# EAGLE board ArtemisDevKit-Panel (EAGLE 9.6.0), part 1 of 3
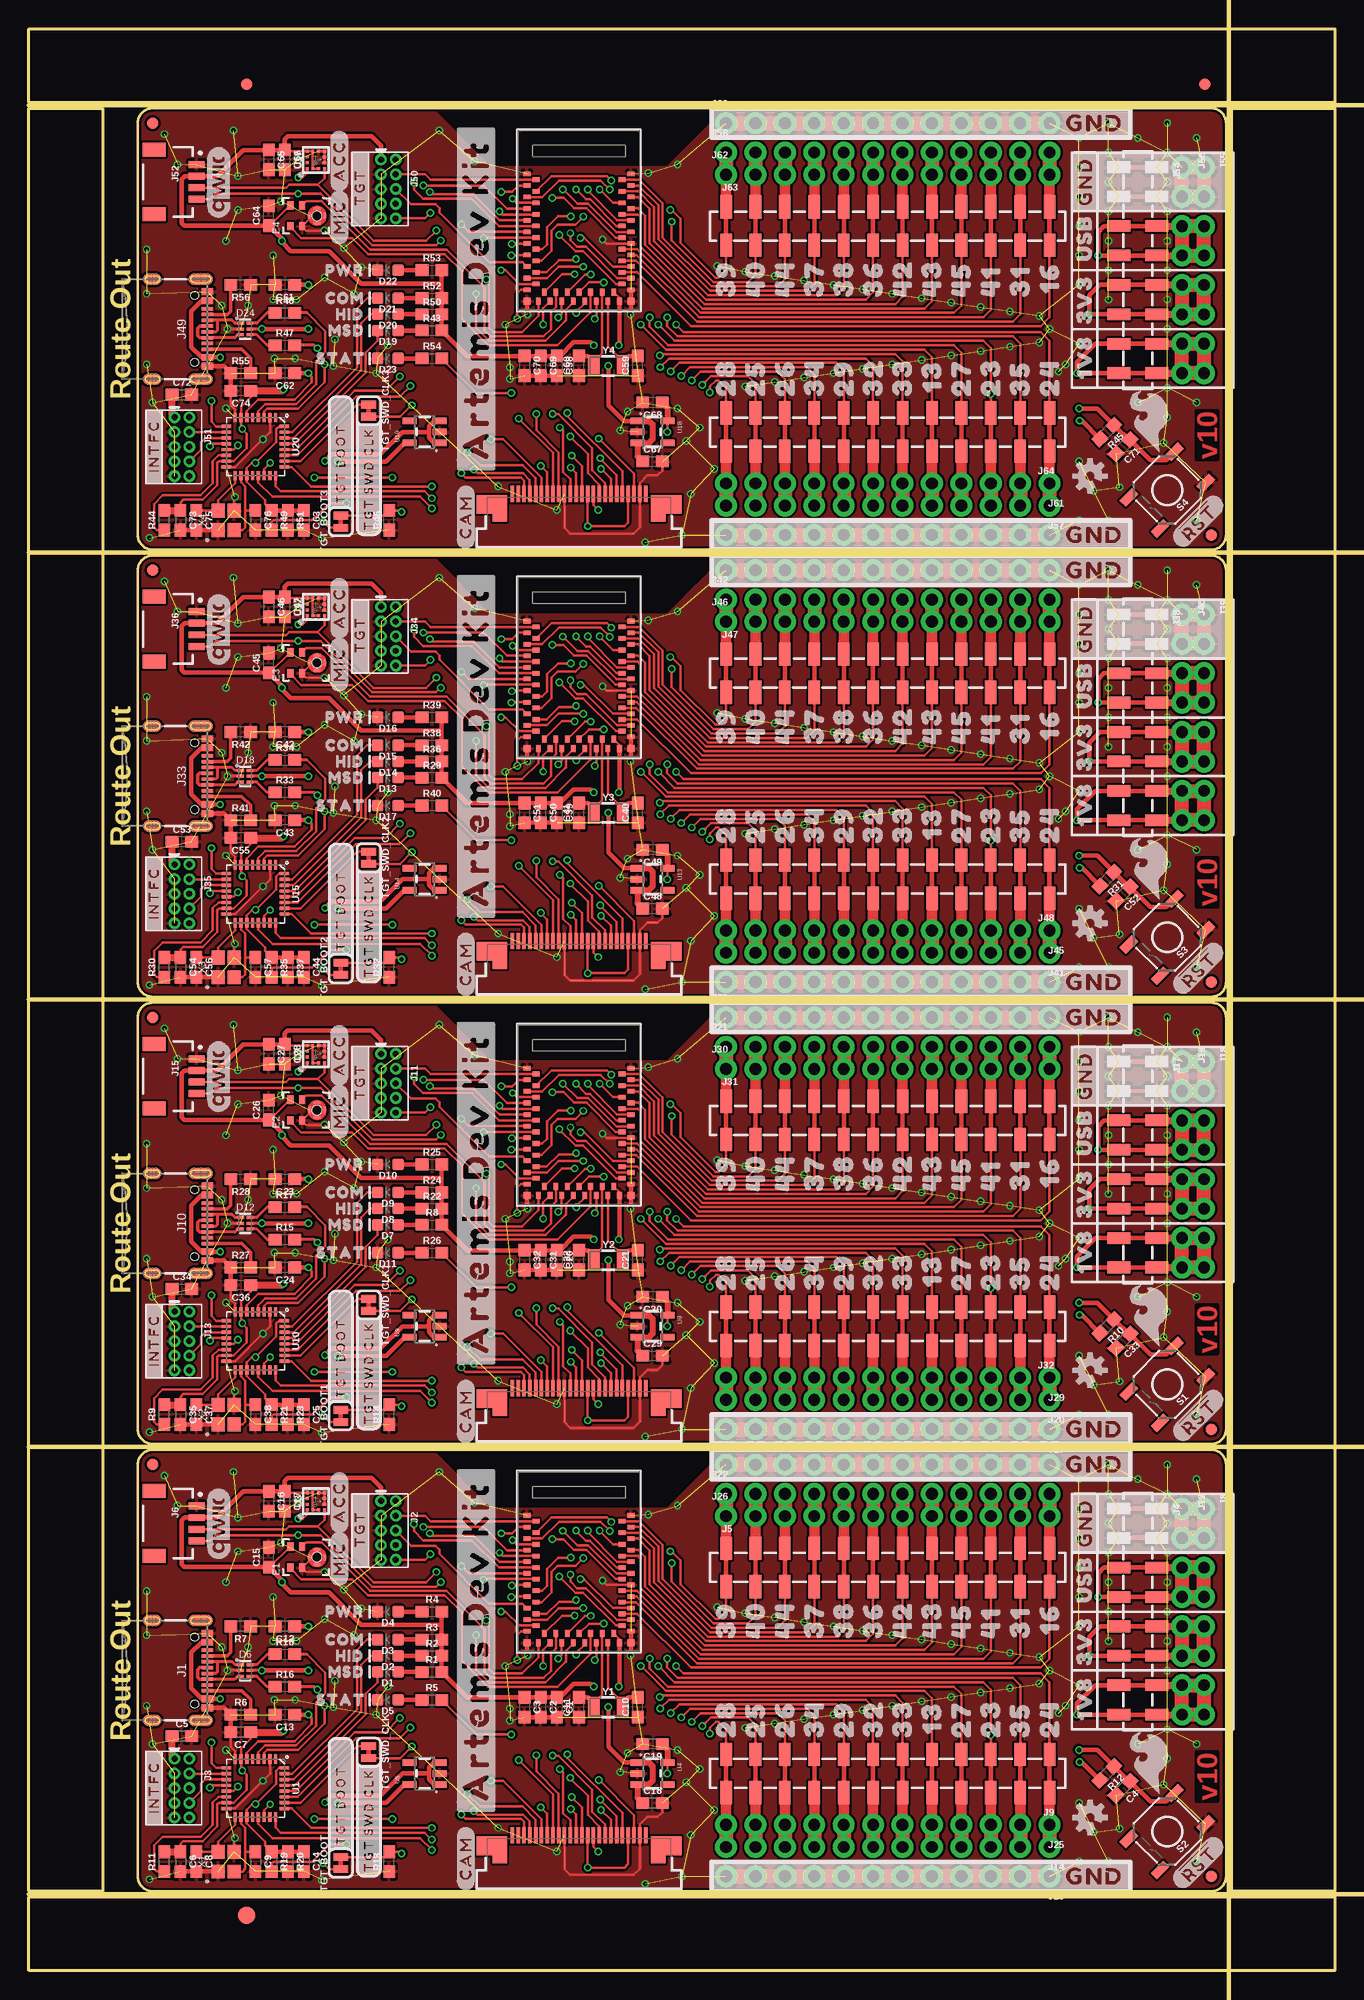
[diagram p0: board, top side]
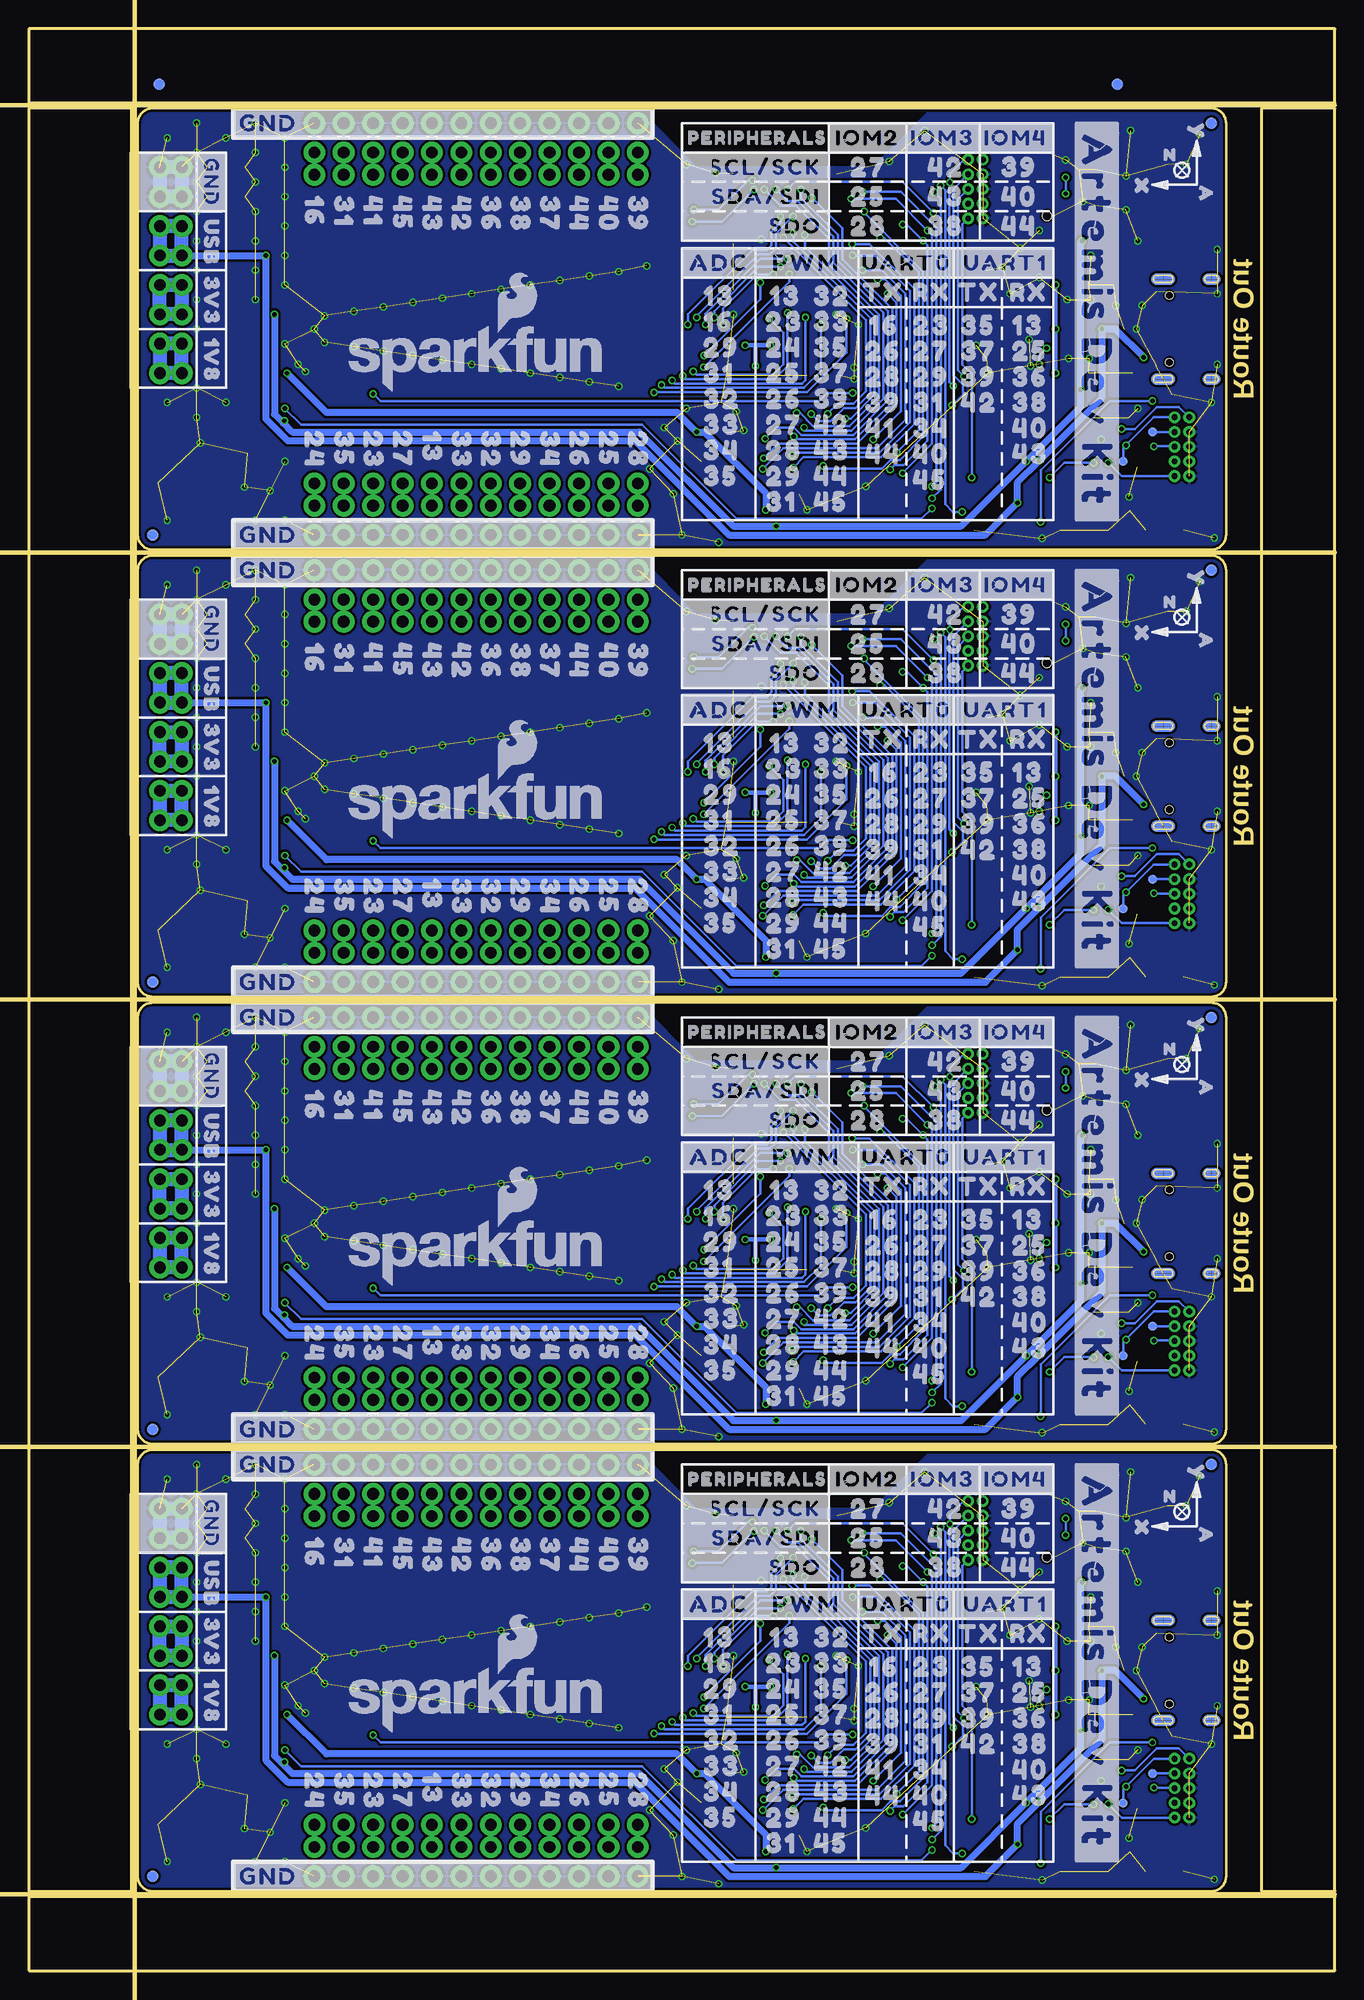
[diagram p1: board, bottom side, seen from below]

Size 112.78 x 167.65 mm. Coordinates in mm from the lower left corner, seen from the top.
Outline: 102.11,44.96 10.67,44.96 arc90 9.4,43.69 9.4,8.13 arc90 10.67,6.86 102.11,6.86 arc90 103.38,8.13 103.38,43.69 arc90 102.11,44.96
Outline: 102.11,83.57 10.67,83.57 arc90 9.4,82.3 9.4,46.74 arc90 10.67,45.47 102.11,45.47 arc90 103.38,46.74 103.38,82.3 arc90 102.11,83.57
Outline: 102.11,122.18 10.67,122.18 arc90 9.4,120.91 9.4,85.35 arc90 10.67,84.08 102.11,84.08 arc90 103.38,85.35 103.38,120.91 arc90 102.11,122.18
Outline: 102.11,160.79 10.67,160.79 arc90 9.4,159.52 9.4,123.96 arc90 10.67,122.69 102.11,122.69 arc90 103.38,123.96 103.38,159.52 arc90 102.11,160.79
Outline: 0,6.35 112.78,6.35 112.78,0 0,0 0,6.35
Outline: 103.89,160.79 112.78,160.79 112.78,6.86 103.89,6.86 103.89,160.79
Outline: 0,167.65 112.78,167.65 112.78,161.3 0,161.3 0,167.65
Outline: 0,160.79 6.35,160.79 6.35,6.86 0,6.86 0,160.79
Copper layers (1*16): Top 0.035mm / dielectric 1.5mm / Bottom 0.035mm
Design rules "ArtemisDevKit": minimum track width 4mil, minimum drill 6mil, track to track 4mil, track to pad 4mil, pad to pad 4mil, via to via 4mil, smd to smd 4mil, copper to edge 4mil, drill to drill 4mil, minimum pad ring 5mil, minimum via ring 5mil, stop-mask expansion 4mil, vias tented up to drill 25mil, thermal gap 10mil
Milling: 6 lines

## Footprints (pad centres in the part's own frame; a part is rotated, then mirrored left to right if it is on the bottom)
0603 = smd 1.1 x 1: 1 -0.85,0; 2 0.85,0
LED-0603 = smd 1 x 1: A -0.877,0; C 0.877,0
SOT886 = smd 0.61 x 0.25: 1 -0.405,0.5 | smd 0.56 x 0.25: 2 -0.43,0; 3 -0.43,-0.5; 4 0.43,-0.5; 5 0.43,0; 6 0.43,0.5
SPH0641LM4H-1_MICROPHONE = smd 0.725 x 0.522: 1 -0.9,1.3; 2 -0.9,0.3; 4 0.9,0.3; 5 0.9,1.3 | smd 0.5 x 0.2: 3 0,-1.65; 8 0,-0.35 | smd 0.2 x 0.5: 6 -0.65,-1; 7 0.65,-1 | hole 0.8: 0,-1
FIDUCIAL-1X2 = smd 1 x 1: 1 0,0
FIDUCIAL-1.5X3 = smd 1.5 x 1.5: 1 0,0
USB-C-16P = smd 0.3 x 1: A5 -1.25,-0.34; A6 -0.25,-0.34; A7 0.25,-0.34; A8 1.25,-0.34; B5 1.75,-0.34; B6 0.75,-0.34; B7 -0.75,-0.34; B8 -1.75,-0.34 | smd 0.6 x 1: GND -3.225,-0.34; GND2 3.225,-0.34; VBUS1 -2.45,-0.34; VBUS2 2.45,-0.34 | smd 1 x 2.1: SHLD1 -4.32,-0.915; SHLD2 4.32,-0.915 | smd 1 x 2.1 bottom: SHLD3 -4.32,-0.915; SHLD4 4.32,-0.915 | smd 1 x 1.6: SHLD5 -4.32,-5.095; SHLD8 4.32,-5.095 | smd 1 x 1.6 bottom: SHLD6 -4.32,-5.095; SHLD7 4.32,-5.095 | hole 0.65: -2.89,-1.445; 2.89,-1.445
2X5-PTH-1.27MM = drill 0.508 pad 1: 1 -2.54,-0.635; 2 -2.54,0.635; 3 -1.27,-0.635; 4 -1.27,0.635; 5 0,-0.635; 6 0,0.635; 7 1.27,-0.635; 8 1.27,0.635; 9 2.54,-0.635; 10 2.54,0.635
1X08_SMD_COMBINED = smd 1 x 2: 1 0,1.65; 1@2 0,-1.65; 2 2.54,-1.65; 2@2 2.54,1.65; 3 5.08,1.65; 3@2 5.08,-1.65; 4 7.62,-1.65; 4@2 7.62,1.65; 5 10.16,1.65; 5@2 10.16,-1.65; 6 12.7,-1.65; 6@2 12.7,1.65; 7 15.24,1.65; 7@2 15.24,-1.65; 8 17.78,-1.65; 8@2 17.78,1.65
1X12_SMD_COMBINED = smd 1 x 2: 1 0,1.65; 1@2 0,-1.65; 2 2.54,-1.65; 2@2 2.54,1.65; 3 5.08,1.65; 3@2 5.08,-1.65; 4 7.62,-1.65; 4@2 7.62,1.65; 5 10.16,1.65; 5@2 10.16,-1.65; 6 12.7,-1.65; 6@2 12.7,1.65; 7 15.24,1.65; 7@2 15.24,-1.65; 8 17.78,-1.65; 8@2 17.78,1.65; 9 20.32,1.65; 9@2 20.32,-1.65; 10 22.86,-1.65; 10@2 22.86,1.65; 11 25.4,1.65; 11@2 25.4,-1.65; 12 27.94,-1.65; 12@2 27.94,1.65
JST04_1MM_RA = smd 0.6 x 1.35: 1 -1.5,0; 2 -0.5,0; 3 0.5,0; 4 1.5,0 | smd 1.2 x 2: NC1 2.8,-3.675; NC2 -2.8,-3.675
FPC-24-AMPHENOL-SFV24R-1STE1HLF = smd 0.3 x 1.4: 1 5.75,2.4; 2 5.25,2.4; 3 4.75,2.4; 4 4.25,2.4; 5 3.75,2.4; 6 3.25,2.4; 7 2.75,2.4; 8 2.25,2.4; 9 1.75,2.4; 10 1.25,2.4; 11 0.75,2.4; 12 0.25,2.4; 13 -0.25,2.4; 14 -0.75,2.4; 15 -1.25,2.4; 16 -1.75,2.4; 17 -2.25,2.4; 18 -2.75,2.4; 19 -3.25,2.4; 20 -3.75,2.4; 21 -4.25,2.4; 22 -4.75,2.4; 23 -5.25,2.4; 24 -5.75,2.4 | smd 1.4 x 1.6: MNT1@0 -8.15,1.5; MNT2@1 8.15,1.5 | smd 1.25 x 2.3: MNT1@1 -6.825,1.15; MNT2@0 6.825,1.15
1X08_NO_SILK = drill 1.016 pad 1.88: 1 0,0; 2 2.54,0; 3 5.08,0; 4 7.62,0; 5 10.16,0; 6 12.7,0; 7 15.24,0; 8 17.78,0
1X12_NO_SILK = drill 1.016 pad 1.88: 1 0,0; 2 2.54,0; 3 5.08,0; 4 7.62,0; 5 10.16,0; 6 12.7,0; 7 15.24,0; 8 17.78,0; 9 20.32,0; 10 22.86,0; 11 25.4,0; 12 27.94,0
TACTILE_SWITCH_SMD_5.2MM = smd 1.524 x 0.762: 1 -2.794,1.905; 2 2.794,1.905; 3 -2.794,-1.905; 4 2.794,-1.905
SMT-JUMPER_2_NC_TRACE_SILK = smd 0.66 x 1.27: 1 -0.521,0; 2 0.521,0
PAD.03X.03 = smd 0.762 x 0.762: P$1 0,0
QFN-32-NOPAD = smd 0.285 x 0.8: 1 -1.75,-2.5; 2 -1.25,-2.5; 3 -0.75,-2.5; 4 -0.25,-2.5; 5 0.25,-2.5; 6 0.75,-2.5; 7 1.25,-2.5; 8 1.75,-2.5; 17 1.75,2.5; 18 1.25,2.5; 19 0.75,2.5; 20 0.25,2.5; 21 -0.25,2.5; 22 -0.75,2.5; 23 -1.25,2.5; 24 -1.75,2.5 | smd 0.8 x 0.285: 9 2.5,-1.75; 10 2.5,-1.25; 11 2.5,-0.75; 12 2.5,-0.25; 13 2.5,0.25; 14 2.5,0.75; 15 2.5,1.25; 16 2.5,1.75; 25 -2.5,1.75; 26 -2.5,1.25; 27 -2.5,0.75; 28 -2.5,0.25; 29 -2.5,-0.25; 30 -2.5,-0.75; 31 -2.5,-1.25; 32 -2.5,-1.75
ARTEMIS_FP = smd 0.4 x 0.6: AD16 -4,-3.7; BOOT 1.5,4.5; D0 0.5,-4.5; D1 -0.5,-4.5; D2 -1,-3.7; D3 2,-3.7; D7 -1.5,4.5; D8 -0.5,4.5; D9 2,3.7; D10 1,3.7; D14 -5,3.7; D17 -3.5,-4.5; D36 2.5,-4.5; D38 3,-3.7; D40 2.5,4.5; D41 -2.5,-4.5; GND@1 4.5,4.5; GND@39 -5.5,-4.5; GND@47 -1.5,-4.5; GND@59 4.5,-4.5; RXI-0 3.5,4.5; SWDCK 4,3.7; SWDIO 0,3.7; TXO-0 0.5,4.5; ~AD31 -3,-3.7; ~AD35 -2,3.7; ~D4 -2.5,4.5; ~D5 -1,3.7; ~D18 -4.5,-4.5; ~D19 -5,-3.7; ~D22 -3.5,4.5; ~D23 -4,3.7; ~D24 -3,3.7; ~D27 -4.5,4.5; ~D28 -5.5,4.5; ~D37 3.5,-4.5; ~D39 3,3.7; ~D42 1.5,-4.5; ~D43 1,-3.7; ~D44 4,-3.7; ~D45 -2,-3.7; ~RST 0,-3.7 | smd 0.6 x 0.4: AD34 -6.5,-0.5; D15 -6.5,0.5; VDD@36 -5.7,-3; VDD@37 -6.5,-3.5; XI -6.5,-2.5; XO -5.7,-2; ~AD11 -5.7,-1; ~AD12 -5.7,2; ~AD13 -5.7,1; ~AD29 -6.5,-1.5; ~AD32 -5.7,3; ~AD33/SWO -5.7,0; ~D6 -6.5,3.5; ~D25 -6.5,2.5; ~D26 -6.5,1.5 | smd 0.6 x 0.6: GND@22 -6.5,4.5; GND@38 -6.5,-4.5
LGA-12-LISDH12 = smd 0.275 x 0.25: 1 -0.75,0.75; 2 -0.75,0.25; 3 -0.75,-0.25; 4 -0.75,-0.75; 7 0.75,-0.75; 8 0.75,-0.25; 9 0.75,0.25; 10 0.75,0.75 | smd 0.25 x 0.275: 5 -0.25,-0.75; 6 0.25,-0.75; 11 0.25,0.75; 12 -0.25,0.75
SOT23-5 = smd 0.55 x 1.2: 1 -0.95,-1.3; 2 0,-1.3; 3 0.95,-1.3; 4 0.95,1.3; 5 -0.95,1.3
CRYSTAL-SMD-2X2.5MM = smd 1.2 x 1.1: P1 0.846,0.69; P2 -0.854,0.69; P3 -0.854,-0.71; P4 0.846,-0.71
CRYSTAL-SMD-3.2X1.5MM = smd 1 x 1.8: P$1 -1.25,0; P$2 1.25,0

## Placement (x,y rotation side)
C1  10uF  [0603]  45.6,22.74 270 top
C2  1.0uF  [0603]  44.2,22.74 270 top
C3  0.1uF  [0603]  42.8,22.74 270 top
C4  0.1uF  [0603]  94.49,15.75 225 top
C5  2.2uF  [0603]  13.21,20.25 0 top
C6  0.1uF  [0603]  13.08,9.4 270 top
C7  0.1uF  [0603]  18.29,20.58 180 top
C8  12pF  [0603]  14.48,9.4 270 top
C9  12pF  [0603]  19.56,9.4 270 top
C10  15pF  [0603]  52.58,22.74 90 top
C11  15pF  [0603]  47.5,22.74 90 top
C12  1.0uF  [0603]  22.1,29.72 180 top
C13  0.1uF  [0603]  22.1,22.1 180 top
C14  0.1uF  [0603]  23.75,9.4 270 top
C15  1.0uF  [0603]  20.7,35.69 90 top
C16  0.1uF  [0603]  20.7,40.52 270 top
C17  10uF  [0603]  22.1,40.52 270 top
C18  1.0uF  [0603]  53.85,14.48 0 top
C19  1.0uF  [0603]  53.85,19.56 180 top
C20  10uF  [0603]  45.6,61.35 270 top
C21  15pF  [0603]  52.58,61.35 90 top
C22  15pF  [0603]  47.5,61.35 90 top
C23  1.0uF  [0603]  22.1,68.33 180 top
C24  0.1uF  [0603]  22.1,60.71 180 top
C25  0.1uF  [0603]  23.75,48.01 270 top
C26  1.0uF  [0603]  20.7,74.3 90 top
C27  0.1uF  [0603]  20.7,79.13 270 top
C28  10uF  [0603]  22.1,79.13 270 top
C29  1.0uF  [0603]  53.85,53.09 0 top
C30  1.0uF  [0603]  53.85,58.17 180 top
C31  1.0uF  [0603]  44.2,61.35 270 top
C32  0.1uF  [0603]  42.8,61.35 270 top
C33  0.1uF  [0603]  94.49,54.36 225 top
C34  2.2uF  [0603]  13.21,58.86 0 top
C35  0.1uF  [0603]  13.08,48.01 270 top
C36  0.1uF  [0603]  18.29,59.19 180 top
C37  12pF  [0603]  14.48,48.01 270 top
C38  12pF  [0603]  19.56,48.01 270 top
C39  10uF  [0603]  45.6,99.96 270 top
C40  15pF  [0603]  52.58,99.96 90 top
C41  15pF  [0603]  47.5,99.96 90 top
C42  1.0uF  [0603]  22.1,106.94 180 top
C43  0.1uF  [0603]  22.1,99.32 180 top
C44  0.1uF  [0603]  23.75,86.62 270 top
C45  1.0uF  [0603]  20.7,112.91 90 top
C46  0.1uF  [0603]  20.7,117.74 270 top
C47  10uF  [0603]  22.1,117.74 270 top
C48  1.0uF  [0603]  53.85,91.7 0 top
C49  1.0uF  [0603]  53.85,96.78 180 top
C50  1.0uF  [0603]  44.2,99.96 270 top
C51  0.1uF  [0603]  42.8,99.96 270 top
C52  0.1uF  [0603]  94.49,92.97 225 top
C53  2.2uF  [0603]  13.21,97.47 0 top
C54  0.1uF  [0603]  13.08,86.62 270 top
C55  0.1uF  [0603]  18.29,97.8 180 top
C56  12pF  [0603]  14.48,86.62 270 top
C57  12pF  [0603]  19.56,86.62 270 top
C58  10uF  [0603]  45.6,138.56 270 top
C59  15pF  [0603]  52.58,138.56 90 top
C60  15pF  [0603]  47.5,138.56 90 top
C61  1.0uF  [0603]  22.1,145.55 180 top
C62  0.1uF  [0603]  22.1,137.93 180 top
C63  0.1uF  [0603]  23.75,125.23 270 top
C64  1.0uF  [0603]  20.7,151.52 90 top
C65  0.1uF  [0603]  20.7,156.34 270 top
C66  10uF  [0603]  22.1,156.34 270 top
C67  1.0uF  [0603]  53.85,130.31 0 top
C68  1.0uF  [0603]  53.85,135.39 180 top
C69  1.0uF  [0603]  44.2,138.56 270 top
C70  0.1uF  [0603]  42.8,138.56 270 top
C71  0.1uF  [0603]  94.49,131.58 225 top
C72  2.2uF  [0603]  13.21,136.08 0 top
C73  0.1uF  [0603]  13.08,125.23 270 top
C74  0.1uF  [0603]  18.29,136.41 180 top
C75  12pF  [0603]  14.48,125.23 270 top
C76  12pF  [0603]  19.56,125.23 270 top
D1  BLUE  [LED-0603]  30.99,25.78 180 top
D2  GREEN  [LED-0603]  30.99,27.18 180 top
D3  Yellow  [LED-0603]  30.99,28.58 180 top
D4  RED  [LED-0603]  30.99,30.99 180 top
D5  BLUE  [LED-0603]  30.99,23.37 180 top
D6  PRTR5V0U2F  [SOT886]  18.67,25.91 0 top
D7  BLUE  [LED-0603]  30.99,64.39 180 top
D8  GREEN  [LED-0603]  30.99,65.79 180 top
D9  Yellow  [LED-0603]  30.99,67.19 180 top
D10  RED  [LED-0603]  30.99,69.6 180 top
D11  BLUE  [LED-0603]  30.99,61.98 180 top
D12  PRTR5V0U2F  [SOT886]  18.67,64.52 0 top
D13  BLUE  [LED-0603]  30.99,103 180 top
D14  GREEN  [LED-0603]  30.99,104.4 180 top
D15  Yellow  [LED-0603]  30.99,105.8 180 top
D16  RED  [LED-0603]  30.99,108.21 180 top
D17  BLUE  [LED-0603]  30.99,100.59 180 top
D18  PRTR5V0U2F  [SOT886]  18.67,103.13 0 top
D19  BLUE  [LED-0603]  30.99,141.61 180 top
D20  GREEN  [LED-0603]  30.99,143.01 180 top
D21  Yellow  [LED-0603]  30.99,144.41 180 top
D22  RED  [LED-0603]  30.99,146.82 180 top
D23  BLUE  [LED-0603]  30.99,139.2 180 top
D24  PRTR5V0U2F  [SOT886]  18.67,141.74 0 top
E1  SPH0641LM4H-1  [SPH0641LM4H-1_MICROPHONE]  23.88,35.69 90 top
E2  SPH0641LM4H-1  [SPH0641LM4H-1_MICROPHONE]  23.88,74.3 90 top
E3  SPH0641LM4H-1  [SPH0641LM4H-1_MICROPHONE]  23.88,112.91 90 top
E4  SPH0641LM4H-1  [SPH0641LM4H-1_MICROPHONE]  23.88,151.52 90 top
E$1  [FIDUCIAL-1X2]  18.8,162.89 0 top
E$2  [FIDUCIAL-1X2]  18.8,162.89 0 bottom
E$3  [FIDUCIAL-1X2]  101.54,162.89 0 top
E$4  [FIDUCIAL-1X2]  101.54,162.89 0 bottom
E$5  [FIDUCIAL-1.5X3]  18.8,4.76 0 top
FD1  FIDUCIAL1X2  [FIDUCIAL-1X2]  10.67,43.69 0 top
FD2  FIDUCIAL1X2  [FIDUCIAL-1X2]  10.67,43.69 0 bottom
FD3  FIDUCIAL1X2  [FIDUCIAL-1X2]  102.11,8.13 0 top
FD4  FIDUCIAL1X2  [FIDUCIAL-1X2]  102.11,8.13 0 bottom
FD5  FIDUCIAL1X2  [FIDUCIAL-1X2]  10.67,82.3 0 top
FD6  FIDUCIAL1X2  [FIDUCIAL-1X2]  10.67,82.3 0 bottom
FD7  FIDUCIAL1X2  [FIDUCIAL-1X2]  102.11,46.74 0 top
FD8  FIDUCIAL1X2  [FIDUCIAL-1X2]  102.11,46.74 0 bottom
FD9  FIDUCIAL1X2  [FIDUCIAL-1X2]  10.67,120.91 0 top
FD10  FIDUCIAL1X2  [FIDUCIAL-1X2]  10.67,120.91 0 bottom
FD11  FIDUCIAL1X2  [FIDUCIAL-1X2]  102.11,85.35 0 top
FD12  FIDUCIAL1X2  [FIDUCIAL-1X2]  102.11,85.35 0 bottom
FD13  FIDUCIAL1X2  [FIDUCIAL-1X2]  10.67,159.52 0 top
FD14  FIDUCIAL1X2  [FIDUCIAL-1X2]  10.67,159.52 0 bottom
FD15  FIDUCIAL1X2  [FIDUCIAL-1X2]  102.11,123.96 0 top
FD16  FIDUCIAL1X2  [FIDUCIAL-1X2]  102.11,123.96 0 bottom
J1  USB  [USB-C-16P]  15.75,25.91 270 top
J2  CORTEX_JTAG_DEBUG_MINIMUM_PTH  [2X5-PTH-1.27MM]  31.04,38 270 top
J3  CORTEX_JTAG_DEBUG_PTH  [2X5-PTH-1.27MM]  13.21,15.75 270 top
J4  SMD  [1X08_SMD_COMBINED]  95.76,39.88 270 top
J5  [1X12_SMD_COMBINED]  60.2,34.8 0 top
J6  QWIIC_RIGHT_ANGLE  [JST04_1MM_RA]  14.48,38.61 270 top
J7  CAMERA-HIMAXBOTTOM-CONTACT  [FPC-24-AMPHENOL-SFV24R-1STE1HLF]  47.5,9.27 0 top
J8  PTH  [1X08_NO_SILK]  101.48,39.88 270 top
J9  [1X12_SMD_COMBINED]  88.14,17.02 180 top
J10  USB  [USB-C-16P]  15.75,64.52 270 top
J11  CORTEX_JTAG_DEBUG_MINIMUM_PTH  [2X5-PTH-1.27MM]  31.04,76.61 270 top
J12  PTH  [1X08_NO_SILK]  99.57,39.88 270 top
J13  CORTEX_JTAG_DEBUG_PTH  [2X5-PTH-1.27MM]  13.21,54.36 270 top
J14  PTH  [1X12_NO_SILK]  88.14,10.67 180 top
J15  QWIIC_RIGHT_ANGLE  [JST04_1MM_RA]  14.48,77.22 270 top
J16  CAMERA-HIMAXBOTTOM-CONTACT  [FPC-24-AMPHENOL-SFV24R-1STE1HLF]  47.5,47.88 0 top
J17  SMD  [1X08_SMD_COMBINED]  95.76,78.49 270 top
J18  PTH  [1X08_NO_SILK]  101.48,78.49 270 top
J19  PTH  [1X08_NO_SILK]  99.57,78.49 270 top
J20  PTH  [1X12_NO_SILK]  88.14,49.28 180 top
J21  PTH  [1X12_NO_SILK]  60.2,79.76 0 top
J22  PTH  [1X12_NO_SILK]  60.2,41.15 0 top
J23  PTH  [1X12_NO_SILK]  88.14,8.13 180 top
J24  PTH  [1X12_NO_SILK]  60.2,43.69 0 top
J25  PTH  [1X12_NO_SILK]  88.14,12.58 180 top
J26  PTH  [1X12_NO_SILK]  60.2,39.25 0 top
J27  PTH  [1X12_NO_SILK]  88.14,46.74 180 top
J28  PTH  [1X12_NO_SILK]  60.2,82.3 0 top
J29  PTH  [1X12_NO_SILK]  88.14,51.19 180 top
J30  PTH  [1X12_NO_SILK]  60.2,77.86 0 top
J31  [1X12_SMD_COMBINED]  60.2,73.41 0 top
J32  [1X12_SMD_COMBINED]  88.14,55.63 180 top
J33  USB  [USB-C-16P]  15.75,103.13 270 top
J34  CORTEX_JTAG_DEBUG_MINIMUM_PTH  [2X5-PTH-1.27MM]  31.04,115.22 270 top
J35  CORTEX_JTAG_DEBUG_PTH  [2X5-PTH-1.27MM]  13.21,92.97 270 top
J36  QWIIC_RIGHT_ANGLE  [JST04_1MM_RA]  14.48,115.83 270 top
J37  CAMERA-HIMAXBOTTOM-CONTACT  [FPC-24-AMPHENOL-SFV24R-1STE1HLF]  47.5,86.49 0 top
J38  SMD  [1X08_SMD_COMBINED]  95.76,117.1 270 top
J39  PTH  [1X08_NO_SILK]  101.48,117.1 270 top
J40  PTH  [1X08_NO_SILK]  99.57,117.1 270 top
J41  PTH  [1X12_NO_SILK]  88.14,87.89 180 top
J42  PTH  [1X12_NO_SILK]  60.2,118.37 0 top
J43  PTH  [1X12_NO_SILK]  88.14,85.35 180 top
J44  PTH  [1X12_NO_SILK]  60.2,120.91 0 top
J45  PTH  [1X12_NO_SILK]  88.14,89.8 180 top
J46  PTH  [1X12_NO_SILK]  60.2,116.47 0 top
J47  [1X12_SMD_COMBINED]  60.2,112.02 0 top
J48  [1X12_SMD_COMBINED]  88.14,94.24 180 top
J49  USB  [USB-C-16P]  15.75,141.74 270 top
J50  CORTEX_JTAG_DEBUG_MINIMUM_PTH  [2X5-PTH-1.27MM]  31.04,153.83 270 top
J51  CORTEX_JTAG_DEBUG_PTH  [2X5-PTH-1.27MM]  13.21,131.58 270 top
J52  QWIIC_RIGHT_ANGLE  [JST04_1MM_RA]  14.48,154.44 270 top
J53  CAMERA-HIMAXBOTTOM-CONTACT  [FPC-24-AMPHENOL-SFV24R-1STE1HLF]  47.5,125.1 0 top
J54  SMD  [1X08_SMD_COMBINED]  95.76,155.71 270 top
J55  PTH  [1X08_NO_SILK]  101.48,155.71 270 top
J56  PTH  [1X08_NO_SILK]  99.57,155.71 270 top
J57  PTH  [1X12_NO_SILK]  88.14,126.5 180 top
J58  PTH  [1X12_NO_SILK]  60.2,156.98 0 top
J59  PTH  [1X12_NO_SILK]  88.14,123.96 180 top
J60  PTH  [1X12_NO_SILK]  60.2,159.52 0 top
J61  PTH  [1X12_NO_SILK]  88.14,128.4 180 top
J62  PTH  [1X12_NO_SILK]  60.2,155.07 0 top
J63  [1X12_SMD_COMBINED]  60.2,150.63 0 top
J64  [1X12_SMD_COMBINED]  88.14,132.85 180 top
LOGO1  OSHW-LOGOS  [OSHW-LOGO-S]  91.63,13.21 45 top
LOGO2  SFE_LOGO_NAME_FLAME.2_INCH  [SFE_LOGO_NAME_FLAME_.2]  74.17,23.37 0 bottom
LOGO3  OSHW-LOGOS  [OSHW-LOGO-S]  91.63,51.82 45 top
LOGO4  SFE_LOGO_NAME_FLAME.2_INCH  [SFE_LOGO_NAME_FLAME_.2]  74.17,61.98 0 bottom
LOGO5  OSHW-LOGOS  [OSHW-LOGO-S]  91.63,90.43 45 top
LOGO6  SFE_LOGO_NAME_FLAME.2_INCH  [SFE_LOGO_NAME_FLAME_.2]  74.17,100.59 0 bottom
LOGO7  OSHW-LOGOS  [OSHW-LOGO-S]  91.63,129.04 45 top
LOGO8  SFE_LOGO_NAME_FLAME.2_INCH  [SFE_LOGO_NAME_FLAME_.2]  74.17,139.2 0 bottom
R1  330  [0603]  34.8,25.78 0 top
R2  330  [0603]  34.8,27.18 0 top
R3  330  [0603]  34.8,28.58 0 top
R4  330  [0603]  34.8,30.99 0 top
R5  330  [0603]  34.8,23.37 0 top
R6  5.1k  [0603]  18.29,22.1 0 top
R7  5.1k  [0603]  18.29,29.72 180 top
R8  330  [0603]  34.8,64.39 0 top
R9  10k  [0603]  11.69,48.01 90 top
R10  10k  [0603]  93.09,55.63 225 top
R11  10k  [0603]  11.69,9.4 90 top
R12  10k  [0603]  93.09,17.02 225 top
R13  10k  [0603]  31.12,9.4 90 top
R14  10k  [0603]  31.12,48.01 90 top
R15  33  [0603]  22.1,63.12 0 top
R16  33  [0603]  22.1,24.51 0 top
R17  33  [0603]  22.1,65.92 0 top
R18  33  [0603]  22.1,27.31 0 top
R19  5.62k  [0603]  20.96,9.4 270 top
R20  10k  [0603]  22.35,9.4 270 top
R21  5.62k  [0603]  20.96,48.01 270 top
R22  330  [0603]  34.8,65.79 0 top
R23  10k  [0603]  22.35,48.01 270 top
R24  330  [0603]  34.8,67.19 0 top
R25  330  [0603]  34.8,69.6 0 top
R26  330  [0603]  34.8,61.98 0 top
R27  5.1k  [0603]  18.29,60.71 0 top
R28  5.1k  [0603]  18.29,68.33 180 top
R29  330  [0603]  34.8,103 0 top
R30  10k  [0603]  11.69,86.62 90 top
R31  10k  [0603]  93.09,94.24 225 top
R32  10k  [0603]  31.12,86.62 90 top
R33  33  [0603]  22.1,101.73 0 top
R34  33  [0603]  22.1,104.53 0 top
R35  5.62k  [0603]  20.96,86.62 270 top
R36  330  [0603]  34.8,104.4 0 top
R37  10k  [0603]  22.35,86.62 270 top
R38  330  [0603]  34.8,105.8 0 top
R39  330  [0603]  34.8,108.21 0 top
R40  330  [0603]  34.8,100.59 0 top
R41  5.1k  [0603]  18.29,99.32 0 top
R42  5.1k  [0603]  18.29,106.94 180 top
R43  330  [0603]  34.8,141.61 0 top
R44  10k  [0603]  11.69,125.23 90 top
R45  10k  [0603]  93.09,132.85 225 top
R46  10k  [0603]  31.12,125.23 90 top
R47  33  [0603]  22.1,140.34 0 top
R48  33  [0603]  22.1,143.14 0 top
R49  5.62k  [0603]  20.96,125.23 270 top
R50  330  [0603]  34.8,143.01 0 top
R51  10k  [0603]  22.35,125.23 270 top
R52  330  [0603]  34.8,144.41 0 top
R53  330  [0603]  34.8,146.82 0 top
R54  330  [0603]  34.8,139.2 0 top
R55  5.1k  [0603]  18.29,137.93 0 top
R56  5.1k  [0603]  18.29,145.55 180 top
S1  TGT_RST  [TACTILE_SWITCH_SMD_5.2MM]  98.3,50.61 225 top
S2  TGT_RST  [TACTILE_SWITCH_SMD_5.2MM]  98.3,12 225 top
S3  TGT_RST  [TACTILE_SWITCH_SMD_5.2MM]  98.3,89.23 225 top
S4  TGT_RST  [TACTILE_SWITCH_SMD_5.2MM]  98.3,127.83 225 top
TGT_BOOT  JUMPER-SMT_2_NC_TRACE_SILK  [SMT-JUMPER_2_NC_TRACE_SILK]  26.93,9.27 90 top
TGT_BOOT1  JUMPER-SMT_2_NC_TRACE_SILK  [SMT-JUMPER_2_NC_TRACE_SILK]  26.93,47.88 90 top
TGT_BOOT2  JUMPER-SMT_2_NC_TRACE_SILK  [SMT-JUMPER_2_NC_TRACE_SILK]  26.93,86.49 90 top
TGT_BOOT3  JUMPER-SMT_2_NC_TRACE_SILK  [SMT-JUMPER_2_NC_TRACE_SILK]  26.93,125.1 90 top
TGT_SWD_CLK  JUMPER-SMT_2_NC_TRACE_SILK  [SMT-JUMPER_2_NC_TRACE_SILK]  29.34,18.86 270 top
TGT_SWD_CLK1  JUMPER-SMT_2_NC_TRACE_SILK  [SMT-JUMPER_2_NC_TRACE_SILK]  29.34,57.47 270 top
TGT_SWD_CLK2  JUMPER-SMT_2_NC_TRACE_SILK  [SMT-JUMPER_2_NC_TRACE_SILK]  29.34,96.08 270 top
TGT_SWD_CLK3  JUMPER-SMT_2_NC_TRACE_SILK  [SMT-JUMPER_2_NC_TRACE_SILK]  29.34,134.69 270 top
TP1  INTFC_SWDIO  [PAD.03X.03]  18.29,14.48 0 bottom
TP2  INTFC_SWDCLK  [PAD.03X.03]  15.75,17.02 0 bottom
TP3  INTFC_SWDIO  [PAD.03X.03]  18.29,53.09 0 bottom
TP4  INTFC_SWDCLK  [PAD.03X.03]  15.75,55.63 0 bottom
TP5  INTFC_SWDIO  [PAD.03X.03]  18.29,91.7 0 bottom
TP6  INTFC_SWDCLK  [PAD.03X.03]  15.75,94.24 0 bottom
TP7  INTFC_SWDIO  [PAD.03X.03]  18.29,130.31 0 bottom
TP8  INTFC_SWDCLK  [PAD.03X.03]  15.75,132.85 0 bottom
U1  DAPLINK_KL26Z128VFM4  [QFN-32-NOPAD]  19.56,15.75 180 top
U2  ARTEMIS_MODULESMD  [ARTEMIS_FP]  47.5,34.8 90 top
U3  LIS2DH12  [LGA-12-LISDH12]  24.77,40.52 90 top
U4  AP2127K-1.8V  [SOT23-5]  53.85,17.02 270 top
U5  3.3V  [SOT23-5]  34.17,17.02 90 top
U6  ARTEMIS_MODULESMD  [ARTEMIS_FP]  47.5,73.41 90 top
U7  LIS2DH12  [LGA-12-LISDH12]  24.77,79.13 90 top
U8  AP2127K-1.8V  [SOT23-5]  53.85,55.63 270 top
U9  3.3V  [SOT23-5]  34.17,55.63 90 top
U10  DAPLINK_KL26Z128VFM4  [QFN-32-NOPAD]  19.56,54.36 180 top
U11  ARTEMIS_MODULESMD  [ARTEMIS_FP]  47.5,112.02 90 top
U12  LIS2DH12  [LGA-12-LISDH12]  24.77,117.74 90 top
U13  AP2127K-1.8V  [SOT23-5]  53.85,94.24 270 top
U14  3.3V  [SOT23-5]  34.17,94.24 90 top
U15  DAPLINK_KL26Z128VFM4  [QFN-32-NOPAD]  19.56,92.97 180 top
U16  ARTEMIS_MODULESMD  [ARTEMIS_FP]  47.5,150.63 90 top
U17  LIS2DH12  [LGA-12-LISDH12]  24.77,156.34 90 top
U18  AP2127K-1.8V  [SOT23-5]  53.85,132.85 270 top
U19  3.3V  [SOT23-5]  34.17,132.85 90 top
U20  DAPLINK_KL26Z128VFM4  [QFN-32-NOPAD]  19.56,131.58 180 top
U$1  [#GND#10]  95.76,8.13 0 bottom
U$2  [#GND#10]  95.76,43.69 0 bottom
U$3  [15_#GND#]  97.03,41.66 270 bottom
U$4  [16_1V8]  97.03,26.04 270 bottom
U$5  [17_3V3]  97.03,31.37 270 bottom
U$6  [18_USB]  97.03,36.32 270 bottom
U$7  [33_16]  88.14,38.61 270 bottom
U$8  [41_31]  85.6,38.61 270 bottom
U$9  [51_41]  83.06,38.61 270 bottom
U$10  [55_45]  80.52,38.61 270 bottom
U$11  [53_43]  77.98,38.61 270 bottom
U$12  [52_42]  75.44,38.61 270 bottom
U$13  [46_36]  72.9,38.61 270 bottom
U$14  [48_38]  70.36,38.61 270 bottom
U$15  [47_37]  67.82,38.61 270 bottom
U$16  [54_44]  65.28,38.61 270 bottom
U$17  [50_40]  62.74,38.61 270 bottom
U$18  [49_39]  60.2,38.61 270 bottom
U$19  [35_24]  88.14,18.29 270 bottom
U$20  [45_35]  85.6,18.29 270 bottom
U$21  [34_23]  83.06,18.29 270 bottom
U$22  [38_27]  80.52,18.29 270 bottom
U$23  [32_13]  77.98,18.29 270 bottom
U$24  [43_33]  75.44,18.29 270 bottom
U$25  [42_32]  72.9,18.29 270 bottom
U$26  [40_29]  70.36,18.29 270 bottom
U$27  [44_34]  67.82,18.29 270 bottom
U$28  [37_26]  65.28,18.29 270 bottom
U$29  [36_25]  62.74,18.29 270 bottom
U$30  [39_28]  60.2,18.29 270 bottom
U$31  [19_#IOM2#]  44.2,42.42 0 bottom
U$32  [QWIIC_6MM]  16.39,38.61 90 top
U$33  [20_#IOM3#]  37.72,42.42 0 bottom
U$34  [21_#IOM4#]  31.37,42.42 0 bottom
U$35  [#TGT#3]  28.58,35.82 90 top
U$36  [#ARTEMIS_DEV_KIT#0]  20.58,44.71 270 bottom
U$37  [#SCL#SCK#23]  55.12,39.88 0 bottom
U$38  [30_#PWM#]  49.72,31.63 0 bottom
U$39  [29_#ADC#]  56.9,31.63 0 bottom
U$40  [25_#UART0#]  41.91,31.63 0 bottom
U$41  [26_#UART1#]  33.15,31.63 0 bottom
U$42  [27_TX]  41.91,29.09 0 bottom
U$43  [27_TX]  33.66,29.09 0 bottom
U$44  [28_RX]  37.59,29.09 0 bottom
U$45  [SFE_LOGO_FLAME_.2]  97.03,18.29 45 top
U$46  [28_RX]  29.21,29.09 0 bottom
U$47  [49_39]  60.2,27.5 90 top
U$48  [50_40]  62.74,27.5 90 top
U$49  [54_44]  65.28,27.5 90 top
U$50  [47_37]  67.82,27.5 90 top
U$51  [48_38]  70.36,27.5 90 top
U$52  [46_36]  72.9,27.5 90 top
U$53  [52_42]  75.44,27.5 90 top
U$54  [53_43]  77.98,27.5 90 top
U$55  [55_45]  80.52,27.5 90 top
U$56  [32_13]  50.04,28.77 0 bottom
U$57  [34_23]  50.36,26.55 0 bottom
U$58  [35_24]  50.36,24.32 0 bottom
U$59  [36_25]  50.36,22.1 0 bottom
U$60  [37_26]  50.36,19.88 0 bottom
U$61  [38_27]  50.36,17.66 0 bottom
U$62  [39_28]  50.36,15.43 0 bottom
U$63  [40_29]  50.36,13.21 0 bottom
U$64  [33_16]  41.47,26.23 0 bottom
U$65  [37_26]  41.79,24.01 0 bottom
U$66  [39_28]  41.79,21.78 0 bottom
U$67  [49_39]  41.79,19.56 0 bottom
U$68  [51_41]  41.79,17.34 0 bottom
U$69  [54_44]  41.79,15.12 0 bottom
U$70  [34_23]  37.66,26.23 0 bottom
U$71  [38_27]  37.66,24.01 0 bottom
U$72  [40_29]  37.66,21.78 0 bottom
U$73  [41_31]  37.66,19.56 0 bottom
U$74  [44_34]  37.66,17.34 0 bottom
U$75  [50_40]  37.66,15.12 0 bottom
U$76  [55_45]  37.66,12.89 0 bottom
U$77  [45_35]  33.53,26.23 0 bottom
U$78  [47_37]  33.53,24.01 0 bottom
U$79  [49_39]  33.53,21.78 0 bottom
U$80  [52_42]  33.53,19.56 0 bottom
U$81  [32_13]  29.09,26.23 0 bottom
U$82  [36_25]  29.09,24.01 0 bottom
U$83  [46_36]  29.09,21.78 0 bottom
U$84  [48_38]  29.09,19.56 0 bottom
U$85  [50_40]  29.09,17.34 0 bottom
U$86  [53_43]  29.09,15.12 0 bottom
U$87  [38_27]  43.06,39.88 0 bottom
U$88  [36_25]  43.06,37.34 0 bottom
U$89  [39_28]  43.06,34.8 0 bottom
U$90  [52_42]  36.39,39.88 0 bottom
U$91  [53_43]  36.39,37.34 0 bottom
U$92  [48_38]  36.39,34.8 0 bottom
U$93  [49_39]  30.04,39.88 0 bottom
U$94  [50_40]  30.04,37.34 0 bottom
U$95  [54_44]  30.04,34.8 0 bottom
U$96  [51_41]  83.06,27.5 90 top
U$97  [41_31]  85.6,27.5 90 top
U$98  [33_16]  88.14,27.82 90 top
U$99  [39_28]  60.2,18.93 90 top
U$100  [36_25]  62.74,18.93 90 top
U$101  [37_26]  65.28,18.93 90 top
U$102  [44_34]  67.82,18.93 90 top
U$103  [40_29]  70.36,18.93 90 top
U$104  [42_32]  72.9,18.93 90 top
U$105  [43_33]  75.44,18.93 90 top
U$106  [32_13]  77.98,19.24 90 top
U$107  [38_27]  80.52,18.93 90 top
U$108  [34_23]  83.06,18.93 90 top
U$109  [45_35]  85.6,18.93 90 top
U$110  [35_24]  88.14,18.93 90 top
U$111  [#SDA#SDI#24]  54.87,37.34 0 bottom
U$112  [#SDO#25]  49.91,34.8 0 bottom
U$113  [14_A]  11.15,37.56 270 bottom
U$114  [15_X]  16.54,38.52 0 bottom
U$115  [16_Y]  11.62,42.96 270 bottom
U$116  [17_Z]  14.48,41.06 90 bottom
U$117  [7_COM]  24.89,28.58 0 top
U$118  [8_HID]  25.78,27.18 0 top
U$119  [9_MSD]  25.15,25.78 0 top
U$120  [10_STAT]  24.13,23.37 0 top
U$121  [6_PWR]  24.89,30.99 0 top
U$122  [#ARTEMIS_DEV_KIT#1]  38.61,12.96 90 top
U$123  [#INTFC#2]  10.8,12.83 90 top
U$124  [#TGT_BOOT#4]  26.93,10.16 90 top
U$125  [#TGT_SWD_CLK#5]  29.34,7.88 90 top
U$126  [#CAM#13]  37.72,6.99 90 top
U$127  [QWIIC_6MM]  16.39,77.22 90 top
U$128  [SFE_LOGO_FLAME_.2]  97.03,56.9 45 top
U$129  [16_1V8]  91.16,20.67 90 top
U$130  [17_3V3]  91.16,25.43 90 top
U$131  [18_USB]  91.16,30.83 90 top
U$132  [15_#GND#]  91.19,35.56 90 top
U$133  [#GND#10]  95.76,46.74 0 bottom
U$134  [#GND#10]  95.76,82.3 0 bottom
U$135  [15_#GND#]  97.03,80.27 270 bottom
U$136  [16_1V8]  97.03,64.65 270 bottom
U$137  [#MIC#11]  26.8,33.28 90 top
U$138  [#ACC#12]  26.8,37.85 90 top
U$139  [17_3V3]  97.03,69.98 270 bottom
U$140  [14_#GND#]  88.39,43.69 0 top
U$141  [14_#GND#]  88.39,8.13 0 top
U$142  [##RST##18]  99.08,7.42 45 top
U$143  [18_USB]  97.03,74.94 270 bottom
U$144  [27_TX]  41.91,67.7 0 bottom
U$145  [19_PERIPHERALS]  56.71,42.42 0 bottom
U$146  [32_13]  55.76,28.77 0 bottom
U$147  [33_16]  55.76,26.55 0 bottom
U$148  [40_29]  55.76,24.32 0 bottom
U$149  [41_31]  55.76,22.1 0 bottom
U$150  [42_32]  55.76,19.88 0 bottom
U$151  [43_33]  55.76,17.66 0 bottom
U$152  [44_34]  55.76,15.43 0 bottom
U$153  [45_35]  55.76,13.21 0 bottom
U$154  [41_31]  50.36,10.99 0 bottom
U$155  [42_32]  46.23,28.77 0 bottom
U$156  [43_33]  46.23,26.55 0 bottom
U$157  [45_35]  46.23,24.32 0 bottom
U$158  [47_37]  46.23,22.1 0 bottom
U$159  [49_39]  46.23,19.88 0 bottom
U$160  [52_42]  46.23,17.66 0 bottom
U$161  [53_43]  46.23,15.43 0 bottom
U$162  [54_44]  46.23,13.21 0 bottom
U$163  [55_45]  46.23,10.99 0 bottom
U$164  [27_TX]  33.66,67.7 0 bottom
U$165  [28_RX]  37.59,67.7 0 bottom
U$166  [28_RX]  29.21,67.7 0 bottom
U$167  [19_#IOM2#]  44.2,81.03 0 bottom
U$168  [20_#IOM3#]  37.72,81.03 0 bottom
U$169  [21_#IOM4#]  31.37,81.03 0 bottom
U$170  [30_#PWM#]  49.72,70.24 0 bottom
U$171  [29_#ADC#]  56.9,70.24 0 bottom
U$172  [25_#UART0#]  41.91,70.24 0 bottom
U$173  [26_#UART1#]  33.15,70.24 0 bottom
U$174  [16_1V8]  91.16,59.28 90 top
U$175  [17_3V3]  91.16,64.04 90 top
U$176  [18_USB]  91.16,69.44 90 top
U$177  [15_#GND#]  91.19,74.17 90 top
U$178  [#MIC#11]  26.8,71.89 90 top
U$179  [#ACC#12]  26.8,76.46 90 top
U$180  [14_#GND#]  88.39,82.3 0 top
U$181  [14_#GND#]  88.39,46.74 0 top
U$182  [##RST##18]  99.08,46.03 45 top
U$183  [19_PERIPHERALS]  56.71,81.03 0 bottom
U$184  [33_16]  88.14,77.22 270 bottom
U$185  [41_31]  85.6,77.22 270 bottom
U$186  [51_41]  83.06,77.22 270 bottom
U$187  [55_45]  80.52,77.22 270 bottom
U$188  [53_43]  77.98,77.22 270 bottom
U$189  [52_42]  75.44,77.22 270 bottom
U$190  [46_36]  72.9,77.22 270 bottom
U$191  [48_38]  70.36,77.22 270 bottom
U$192  [47_37]  67.82,77.22 270 bottom
U$193  [54_44]  65.28,77.22 270 bottom
U$194  [50_40]  62.74,77.22 270 bottom
U$195  [49_39]  60.2,77.22 270 bottom
U$196  [35_24]  88.14,56.9 270 bottom
U$197  [45_35]  85.6,56.9 270 bottom
U$198  [34_23]  83.06,56.9 270 bottom
U$199  [38_27]  80.52,56.9 270 bottom
U$200  [32_13]  77.98,56.9 270 bottom
U$201  [43_33]  75.44,56.9 270 bottom
U$202  [42_32]  72.9,56.9 270 bottom
U$203  [40_29]  70.36,56.9 270 bottom
U$204  [44_34]  67.82,56.9 270 bottom
U$205  [37_26]  65.28,56.9 270 bottom
U$206  [36_25]  62.74,56.9 270 bottom
U$207  [39_28]  60.2,56.9 270 bottom
U$208  [32_13]  55.76,67.38 0 bottom
U$209  [33_16]  55.76,65.16 0 bottom
U$210  [40_29]  55.76,62.93 0 bottom
U$211  [41_31]  55.76,60.71 0 bottom
U$212  [42_32]  55.76,58.49 0 bottom
U$213  [43_33]  55.76,56.27 0 bottom
U$214  [44_34]  55.76,54.04 0 bottom
U$215  [45_35]  55.76,51.82 0 bottom
U$216  [32_13]  50.04,67.38 0 bottom
U$217  [34_23]  50.36,65.16 0 bottom
U$218  [35_24]  50.36,62.93 0 bottom
U$219  [36_25]  50.36,60.71 0 bottom
U$220  [37_26]  50.36,58.49 0 bottom
U$221  [38_27]  50.36,56.27 0 bottom
U$222  [39_28]  50.36,54.04 0 bottom
U$223  [40_29]  50.36,51.82 0 bottom
U$224  [41_31]  50.36,49.6 0 bottom
U$225  [42_32]  46.23,67.38 0 bottom
U$226  [43_33]  46.23,65.16 0 bottom
U$227  [45_35]  46.23,62.93 0 bottom
U$228  [47_37]  46.23,60.71 0 bottom
U$229  [49_39]  46.23,58.49 0 bottom
U$230  [52_42]  46.23,56.27 0 bottom
U$231  [53_43]  46.23,54.04 0 bottom
U$232  [54_44]  46.23,51.82 0 bottom
U$233  [55_45]  46.23,49.6 0 bottom
U$234  [33_16]  41.47,64.84 0 bottom
U$235  [37_26]  41.79,62.62 0 bottom
U$236  [39_28]  41.79,60.39 0 bottom
U$237  [49_39]  41.79,58.17 0 bottom
U$238  [51_41]  41.79,55.95 0 bottom
U$239  [54_44]  41.79,53.73 0 bottom
U$240  [34_23]  37.66,64.84 0 bottom
U$241  [38_27]  37.66,62.62 0 bottom
U$242  [40_29]  37.66,60.39 0 bottom
U$243  [41_31]  37.66,58.17 0 bottom
U$244  [44_34]  37.66,55.95 0 bottom
U$245  [50_40]  37.66,53.73 0 bottom
U$246  [55_45]  37.66,51.5 0 bottom
U$247  [45_35]  33.53,64.84 0 bottom
U$248  [47_37]  33.53,62.62 0 bottom
U$249  [49_39]  33.53,60.39 0 bottom
U$250  [52_42]  33.53,58.17 0 bottom
U$251  [32_13]  29.09,64.84 0 bottom
U$252  [36_25]  29.09,62.62 0 bottom
U$253  [46_36]  29.09,60.39 0 bottom
U$254  [48_38]  29.09,58.17 0 bottom
U$255  [50_40]  29.09,55.95 0 bottom
U$256  [53_43]  29.09,53.73 0 bottom
U$257  [38_27]  43.06,78.49 0 bottom
U$258  [36_25]  43.06,75.95 0 bottom
U$259  [39_28]  43.06,73.41 0 bottom
U$260  [52_42]  36.39,78.49 0 bottom
U$261  [53_43]  36.39,75.95 0 bottom
U$262  [48_38]  36.39,73.41 0 bottom
U$263  [49_39]  30.04,78.49 0 bottom
U$264  [50_40]  30.04,75.95 0 bottom
U$265  [54_44]  30.04,73.41 0 bottom
U$266  [49_39]  60.2,66.11 90 top
U$267  [50_40]  62.74,66.11 90 top
U$268  [54_44]  65.28,66.11 90 top
U$269  [47_37]  67.82,66.11 90 top
U$270  [48_38]  70.36,66.11 90 top
U$271  [46_36]  72.9,66.11 90 top
U$272  [52_42]  75.44,66.11 90 top
U$273  [53_43]  77.98,66.11 90 top
U$274  [55_45]  80.52,66.11 90 top
U$275  [51_41]  83.06,66.11 90 top
U$276  [41_31]  85.6,66.11 90 top
U$277  [33_16]  88.14,66.43 90 top
U$278  [39_28]  60.2,57.54 90 top
U$279  [36_25]  62.74,57.54 90 top
U$280  [37_26]  65.28,57.54 90 top
U$281  [44_34]  67.82,57.54 90 top
U$282  [40_29]  70.36,57.54 90 top
U$283  [42_32]  72.9,57.54 90 top
U$284  [43_33]  75.44,57.54 90 top
U$285  [32_13]  77.98,57.85 90 top
U$286  [38_27]  80.52,57.54 90 top
U$287  [34_23]  83.06,57.54 90 top
U$288  [45_35]  85.6,57.54 90 top
U$289  [35_24]  88.14,57.54 90 top
U$290  [14_A]  11.15,76.17 270 bottom
U$291  [15_X]  16.54,77.13 0 bottom
U$292  [16_Y]  11.62,81.57 270 bottom
U$293  [17_Z]  14.48,79.67 90 bottom
U$294  [7_COM]  24.89,67.19 0 top
U$295  [8_HID]  25.78,65.79 0 top
U$296  [9_MSD]  25.15,64.39 0 top
U$297  [10_STAT]  24.13,61.98 0 top
U$298  [6_PWR]  24.89,69.6 0 top
U$299  [#SCL#SCK#23]  55.12,78.49 0 bottom
U$300  [#SDA#SDI#24]  54.87,75.95 0 bottom
U$301  [#SDO#25]  49.91,73.41 0 bottom
U$302  [#ARTEMIS_DEV_KIT#1]  38.61,51.57 90 top
U$303  [#ARTEMIS_DEV_KIT#0]  20.58,83.32 270 bottom
U$304  [#TGT#3]  28.58,74.43 90 top
U$305  [#INTFC#2]  10.8,51.44 90 top
U$306  [#TGT_BOOT#4]  26.93,48.77 90 top
U$307  [#TGT_SWD_CLK#5]  29.34,46.49 90 top
U$308  [#CAM#13]  37.72,45.6 90 top
U$309  [QWIIC_6MM]  16.39,115.83 90 top
U$310  [SFE_LOGO_FLAME_.2]  97.03,95.51 45 top
U$311  [#GND#10]  95.76,85.35 0 bottom
U$312  [#GND#10]  95.76,120.91 0 bottom
U$313  [15_#GND#]  97.03,118.88 270 bottom
U$314  [16_1V8]  97.03,103.26 270 bottom
U$315  [17_3V3]  97.03,108.59 270 bottom
U$316  [18_USB]  97.03,113.55 270 bottom
U$317  [27_TX]  41.91,106.31 0 bottom
U$318  [27_TX]  33.66,106.31 0 bottom
U$319  [28_RX]  37.59,106.31 0 bottom
U$320  [28_RX]  29.21,106.31 0 bottom
U$321  [19_#IOM2#]  44.2,119.64 0 bottom
U$322  [20_#IOM3#]  37.72,119.64 0 bottom
U$323  [21_#IOM4#]  31.37,119.64 0 bottom
U$324  [30_#PWM#]  49.72,108.85 0 bottom
U$325  [29_#ADC#]  56.9,108.85 0 bottom
U$326  [25_#UART0#]  41.91,108.85 0 bottom
U$327  [26_#UART1#]  33.15,108.85 0 bottom
U$328  [16_1V8]  91.16,97.89 90 top
U$329  [17_3V3]  91.16,102.66 90 top
U$330  [18_USB]  91.16,108.05 90 top
U$331  [15_#GND#]  91.19,112.78 90 top
U$332  [#MIC#11]  26.8,110.5 90 top
U$333  [#ACC#12]  26.8,115.07 90 top
U$334  [14_#GND#]  88.39,120.91 0 top
U$335  [14_#GND#]  88.39,85.35 0 top
U$336  [##RST##18]  99.08,84.64 45 top
U$337  [19_PERIPHERALS]  56.71,119.64 0 bottom
U$338  [33_16]  88.14,115.83 270 bottom
U$339  [41_31]  85.6,115.83 270 bottom
U$340  [51_41]  83.06,115.83 270 bottom
U$341  [55_45]  80.52,115.83 270 bottom
U$342  [53_43]  77.98,115.83 270 bottom
U$343  [52_42]  75.44,115.83 270 bottom
U$344  [46_36]  72.9,115.83 270 bottom
U$345  [48_38]  70.36,115.83 270 bottom
U$346  [47_37]  67.82,115.83 270 bottom
U$347  [54_44]  65.28,115.83 270 bottom
U$348  [50_40]  62.74,115.83 270 bottom
U$349  [49_39]  60.2,115.83 270 bottom
U$350  [35_24]  88.14,95.51 270 bottom
U$351  [45_35]  85.6,95.51 270 bottom
U$352  [34_23]  83.06,95.51 270 bottom
U$353  [38_27]  80.52,95.51 270 bottom
U$354  [32_13]  77.98,95.51 270 bottom
U$355  [43_33]  75.44,95.51 270 bottom
U$356  [42_32]  72.9,95.51 270 bottom
U$357  [40_29]  70.36,95.51 270 bottom
U$358  [44_34]  67.82,95.51 270 bottom
U$359  [37_26]  65.28,95.51 270 bottom
U$360  [36_25]  62.74,95.51 270 bottom
U$361  [39_28]  60.2,95.51 270 bottom
U$362  [32_13]  55.76,105.99 0 bottom
U$363  [33_16]  55.76,103.77 0 bottom
U$364  [40_29]  55.76,101.54 0 bottom
U$365  [41_31]  55.76,99.32 0 bottom
U$366  [42_32]  55.76,97.1 0 bottom
U$367  [43_33]  55.76,94.88 0 bottom
U$368  [44_34]  55.76,92.65 0 bottom
U$369  [45_35]  55.76,90.43 0 bottom
U$370  [32_13]  50.04,105.99 0 bottom
U$371  [34_23]  50.36,103.77 0 bottom
U$372  [35_24]  50.36,101.54 0 bottom
U$373  [36_25]  50.36,99.32 0 bottom
U$374  [37_26]  50.36,97.1 0 bottom
U$375  [38_27]  50.36,94.88 0 bottom
U$376  [39_28]  50.36,92.65 0 bottom
U$377  [40_29]  50.36,90.43 0 bottom
U$378  [41_31]  50.36,88.21 0 bottom
U$379  [42_32]  46.23,105.99 0 bottom
U$380  [43_33]  46.23,103.77 0 bottom
U$381  [45_35]  46.23,101.54 0 bottom
U$382  [47_37]  46.23,99.32 0 bottom
U$383  [49_39]  46.23,97.1 0 bottom
U$384  [52_42]  46.23,94.88 0 bottom
U$385  [53_43]  46.23,92.65 0 bottom
U$386  [54_44]  46.23,90.43 0 bottom
U$387  [55_45]  46.23,88.21 0 bottom
U$388  [33_16]  41.47,103.45 0 bottom
U$389  [37_26]  41.79,101.23 0 bottom
U$390  [39_28]  41.79,99 0 bottom
U$391  [49_39]  41.79,96.78 0 bottom
U$392  [51_41]  41.79,94.56 0 bottom
U$393  [54_44]  41.79,92.34 0 bottom
U$394  [34_23]  37.66,103.45 0 bottom
U$395  [38_27]  37.66,101.23 0 bottom
U$396  [40_29]  37.66,99 0 bottom
U$397  [41_31]  37.66,96.78 0 bottom
U$398  [44_34]  37.66,94.56 0 bottom
U$399  [50_40]  37.66,92.34 0 bottom
U$400  [55_45]  37.66,90.11 0 bottom
U$401  [45_35]  33.53,103.45 0 bottom
U$402  [47_37]  33.53,101.23 0 bottom
U$403  [49_39]  33.53,99 0 bottom
U$404  [52_42]  33.53,96.78 0 bottom
U$405  [32_13]  29.09,103.45 0 bottom
U$406  [36_25]  29.09,101.23 0 bottom
U$407  [46_36]  29.09,99 0 bottom
U$408  [48_38]  29.09,96.78 0 bottom
U$409  [50_40]  29.09,94.56 0 bottom
U$410  [53_43]  29.09,92.34 0 bottom
U$411  [38_27]  43.06,117.1 0 bottom
U$412  [36_25]  43.06,114.56 0 bottom
U$413  [39_28]  43.06,112.02 0 bottom
U$414  [52_42]  36.39,117.1 0 bottom
U$415  [53_43]  36.39,114.56 0 bottom
U$416  [48_38]  36.39,112.02 0 bottom
U$417  [49_39]  30.04,117.1 0 bottom
U$418  [50_40]  30.04,114.56 0 bottom
U$419  [54_44]  30.04,112.02 0 bottom
U$420  [49_39]  60.2,104.72 90 top
U$421  [50_40]  62.74,104.72 90 top
U$422  [54_44]  65.28,104.72 90 top
U$423  [47_37]  67.82,104.72 90 top
U$424  [48_38]  70.36,104.72 90 top
U$425  [46_36]  72.9,104.72 90 top
U$426  [52_42]  75.44,104.72 90 top
U$427  [53_43]  77.98,104.72 90 top
U$428  [55_45]  80.52,104.72 90 top
U$429  [51_41]  83.06,104.72 90 top
U$430  [41_31]  85.6,104.72 90 top
U$431  [33_16]  88.14,105.04 90 top
U$432  [39_28]  60.2,96.15 90 top
U$433  [36_25]  62.74,96.15 90 top
U$434  [37_26]  65.28,96.15 90 top
U$435  [44_34]  67.82,96.15 90 top
U$436  [40_29]  70.36,96.15 90 top
U$437  [42_32]  72.9,96.15 90 top
U$438  [43_33]  75.44,96.15 90 top
U$439  [32_13]  77.98,96.46 90 top
U$440  [38_27]  80.52,96.15 90 top
U$441  [34_23]  83.06,96.15 90 top
U$442  [45_35]  85.6,96.15 90 top
U$443  [35_24]  88.14,96.15 90 top
U$444  [14_A]  11.15,114.78 270 bottom
U$445  [15_X]  16.54,115.74 0 bottom
U$446  [16_Y]  11.62,120.18 270 bottom
U$447  [17_Z]  14.48,118.28 90 bottom
U$448  [7_COM]  24.89,105.8 0 top
U$449  [8_HID]  25.78,104.4 0 top
U$450  [9_MSD]  25.15,103 0 top
U$451  [10_STAT]  24.13,100.59 0 top
U$452  [6_PWR]  24.89,108.21 0 top
U$453  [#SCL#SCK#23]  55.12,117.1 0 bottom
U$454  [#SDA#SDI#24]  54.87,114.56 0 bottom
U$455  [#SDO#25]  49.91,112.02 0 bottom
U$456  [#ARTEMIS_DEV_KIT#1]  38.61,90.18 90 top
U$457  [#ARTEMIS_DEV_KIT#0]  20.58,121.93 270 bottom
U$458  [#TGT#3]  28.58,113.04 90 top
U$459  [#INTFC#2]  10.8,90.05 90 top
U$460  [#TGT_BOOT#4]  26.93,87.38 90 top
U$461  [#TGT_SWD_CLK#5]  29.34,85.1 90 top
U$462  [#CAM#13]  37.72,84.21 90 top
U$463  [QWIIC_6MM]  16.39,154.44 90 top
U$464  [SFE_LOGO_FLAME_.2]  97.03,134.12 45 top
U$465  [#GND#10]  95.76,123.96 0 bottom
U$466  [#GND#10]  95.76,159.52 0 bottom
U$467  [15_#GND#]  97.03,157.49 270 bottom
U$468  [16_1V8]  97.03,141.87 270 bottom
U$469  [17_3V3]  97.03,147.2 270 bottom
U$470  [18_USB]  97.03,152.15 270 bottom
U$471  [27_TX]  41.91,144.91 0 bottom
U$472  [27_TX]  33.66,144.91 0 bottom
U$473  [28_RX]  37.59,144.91 0 bottom
U$474  [28_RX]  29.21,144.91 0 bottom
U$475  [19_#IOM2#]  44.2,158.25 0 bottom
U$476  [20_#IOM3#]  37.72,158.25 0 bottom
U$477  [21_#IOM4#]  31.37,158.25 0 bottom
U$478  [30_#PWM#]  49.72,147.45 0 bottom
U$479  [29_#ADC#]  56.9,147.45 0 bottom
U$480  [25_#UART0#]  41.91,147.45 0 bottom
U$481  [26_#UART1#]  33.15,147.45 0 bottom
U$482  [16_1V8]  91.16,136.5 90 top
U$483  [17_3V3]  91.16,141.26 90 top
U$484  [18_USB]  91.16,146.66 90 top
U$485  [15_#GND#]  91.19,151.39 90 top
U$486  [#MIC#11]  26.8,149.11 90 top
U$487  [#ACC#12]  26.8,153.68 90 top
U$488  [14_#GND#]  88.39,159.52 0 top
U$489  [14_#GND#]  88.39,123.96 0 top
U$490  [##RST##18]  99.08,123.25 45 top
U$491  [19_PERIPHERALS]  56.71,158.25 0 bottom
U$492  [33_16]  88.14,154.44 270 bottom
U$493  [41_31]  85.6,154.44 270 bottom
U$494  [51_41]  83.06,154.44 270 bottom
U$495  [55_45]  80.52,154.44 270 bottom
U$496  [53_43]  77.98,154.44 270 bottom
U$497  [52_42]  75.44,154.44 270 bottom
U$498  [46_36]  72.9,154.44 270 bottom
U$499  [48_38]  70.36,154.44 270 bottom
U$500  [47_37]  67.82,154.44 270 bottom
U$501  [54_44]  65.28,154.44 270 bottom
U$502  [50_40]  62.74,154.44 270 bottom
U$503  [49_39]  60.2,154.44 270 bottom
U$504  [35_24]  88.14,134.12 270 bottom
U$505  [45_35]  85.6,134.12 270 bottom
U$506  [34_23]  83.06,134.12 270 bottom
U$507  [38_27]  80.52,134.12 270 bottom
U$508  [32_13]  77.98,134.12 270 bottom
U$509  [43_33]  75.44,134.12 270 bottom
U$510  [42_32]  72.9,134.12 270 bottom
U$511  [40_29]  70.36,134.12 270 bottom
U$512  [44_34]  67.82,134.12 270 bottom
U$513  [37_26]  65.28,134.12 270 bottom
U$514  [36_25]  62.74,134.12 270 bottom
U$515  [39_28]  60.2,134.12 270 bottom
U$516  [32_13]  55.76,144.6 0 bottom
U$517  [33_16]  55.76,142.37 0 bottom
U$518  [40_29]  55.76,140.15 0 bottom
U$519  [41_31]  55.76,137.93 0 bottom
U$520  [42_32]  55.76,135.71 0 bottom
U$521  [43_33]  55.76,133.48 0 bottom
U$522  [44_34]  55.76,131.26 0 bottom
U$523  [45_35]  55.76,129.04 0 bottom
U$524  [32_13]  50.04,144.6 0 bottom
U$525  [34_23]  50.36,142.37 0 bottom
U$526  [35_24]  50.36,140.15 0 bottom
U$527  [36_25]  50.36,137.93 0 bottom
U$528  [37_26]  50.36,135.71 0 bottom
U$529  [38_27]  50.36,133.48 0 bottom
U$530  [39_28]  50.36,131.26 0 bottom
U$531  [40_29]  50.36,129.04 0 bottom
U$532  [41_31]  50.36,126.82 0 bottom
U$533  [42_32]  46.23,144.6 0 bottom
U$534  [43_33]  46.23,142.37 0 bottom
U$535  [45_35]  46.23,140.15 0 bottom
U$536  [47_37]  46.23,137.93 0 bottom
U$537  [49_39]  46.23,135.71 0 bottom
U$538  [52_42]  46.23,133.48 0 bottom
U$539  [53_43]  46.23,131.26 0 bottom
U$540  [54_44]  46.23,129.04 0 bottom
U$541  [55_45]  46.23,126.82 0 bottom
U$542  [33_16]  41.47,142.06 0 bottom
U$543  [37_26]  41.79,139.83 0 bottom
U$544  [39_28]  41.79,137.61 0 bottom
U$545  [49_39]  41.79,135.39 0 bottom
U$546  [51_41]  41.79,133.17 0 bottom
U$547  [54_44]  41.79,130.94 0 bottom
U$548  [34_23]  37.66,142.06 0 bottom
U$549  [38_27]  37.66,139.83 0 bottom
U$550  [40_29]  37.66,137.61 0 bottom
U$551  [41_31]  37.66,135.39 0 bottom
U$552  [44_34]  37.66,133.17 0 bottom
U$553  [50_40]  37.66,130.94 0 bottom
U$554  [55_45]  37.66,128.72 0 bottom
U$555  [45_35]  33.53,142.06 0 bottom
U$556  [47_37]  33.53,139.83 0 bottom
U$557  [49_39]  33.53,137.61 0 bottom
U$558  [52_42]  33.53,135.39 0 bottom
U$559  [32_13]  29.09,142.06 0 bottom
U$560  [36_25]  29.09,139.83 0 bottom
U$561  [46_36]  29.09,137.61 0 bottom
U$562  [48_38]  29.09,135.39 0 bottom
U$563  [50_40]  29.09,133.17 0 bottom
U$564  [53_43]  29.09,130.94 0 bottom
U$565  [38_27]  43.06,155.71 0 bottom
U$566  [36_25]  43.06,153.17 0 bottom
U$567  [39_28]  43.06,150.63 0 bottom
U$568  [52_42]  36.39,155.71 0 bottom
U$569  [53_43]  36.39,153.17 0 bottom
U$570  [48_38]  36.39,150.63 0 bottom
U$571  [49_39]  30.04,155.71 0 bottom
U$572  [50_40]  30.04,153.17 0 bottom
U$573  [54_44]  30.04,150.63 0 bottom
U$574  [49_39]  60.2,143.33 90 top
U$575  [50_40]  62.74,143.33 90 top
U$576  [54_44]  65.28,143.33 90 top
U$577  [47_37]  67.82,143.33 90 top
U$578  [48_38]  70.36,143.33 90 top
U$579  [46_36]  72.9,143.33 90 top
U$580  [52_42]  75.44,143.33 90 top
U$581  [53_43]  77.98,143.33 90 top
U$582  [55_45]  80.52,143.33 90 top
U$583  [51_41]  83.06,143.33 90 top
U$584  [41_31]  85.6,143.33 90 top
U$585  [33_16]  88.14,143.64 90 top
U$586  [39_28]  60.2,134.75 90 top
U$587  [36_25]  62.74,134.75 90 top
U$588  [37_26]  65.28,134.75 90 top
U$589  [44_34]  67.82,134.75 90 top
U$590  [40_29]  70.36,134.75 90 top
U$591  [42_32]  72.9,134.75 90 top
U$592  [43_33]  75.44,134.75 90 top
U$593  [32_13]  77.98,135.07 90 top
U$594  [38_27]  80.52,134.75 90 top
U$595  [34_23]  83.06,134.75 90 top
U$596  [45_35]  85.6,134.75 90 top
U$597  [35_24]  88.14,134.75 90 top
U$598  [14_A]  11.15,153.39 270 bottom
U$599  [15_X]  16.54,154.34 0 bottom
U$600  [16_Y]  11.62,158.79 270 bottom
U$601  [17_Z]  14.48,156.88 90 bottom
U$602  [7_COM]  24.89,144.41 0 top
U$603  [8_HID]  25.78,143.01 0 top
U$604  [9_MSD]  25.15,141.61 0 top
U$605  [10_STAT]  24.13,139.2 0 top
U$606  [6_PWR]  24.89,146.82 0 top
U$607  [#SCL#SCK#23]  55.12,155.71 0 bottom
U$608  [#SDA#SDI#24]  54.87,153.17 0 bottom
U$609  [#SDO#25]  49.91,150.63 0 bottom
U$610  [#ARTEMIS_DEV_KIT#1]  38.61,128.79 90 top
U$611  [#ARTEMIS_DEV_KIT#0]  20.58,160.54 270 bottom
U$612  [#TGT#3]  28.58,151.65 90 top
U$613  [#INTFC#2]  10.8,128.66 90 top
U$614  [#TGT_BOOT#4]  26.93,125.99 90 top
U$615  [#TGT_SWD_CLK#5]  29.34,123.71 90 top
U$616  [#CAM#13]  37.72,122.82 90 top
X1  16MHz  [CRYSTAL-SMD-2X2.5MM]  17.02,9.4 90 top
X2  16MHz  [CRYSTAL-SMD-2X2.5MM]  17.02,48.01 90 top
X3  16MHz  [CRYSTAL-SMD-2X2.5MM]  17.02,86.62 90 top
X4  16MHz  [CRYSTAL-SMD-2X2.5MM]  17.02,125.23 90 top
Y1  32.768kHz  [CRYSTAL-SMD-3.2X1.5MM]  50.04,22.74 0 top
Y2  32.768kHz  [CRYSTAL-SMD-3.2X1.5MM]  50.04,61.35 0 top
Y3  32.768kHz  [CRYSTAL-SMD-3.2X1.5MM]  50.04,99.96 0 top
Y4  32.768kHz  [CRYSTAL-SMD-3.2X1.5MM]  50.04,138.56 0 top

## Library data of the parts
C1 C17 C20 C28 C39 C47 C58 C66 = SparkFun-Capacitors; PROD_ID: CAP-11015
C2 C12 C15 C18 C19 C23 C26 C29-C31 C42 C45 C48-C50 C61 C64 C67-C69 = SparkFun-Capacitors; PROD_ID: CAP-00868
C3 C4 C6 C7 C13 C14 C16 C24 C25 C27 C32 C33 C35 C36 C43 C44 C46 C51 C52 C54 C55 C62 C63 C65 C70 C71 C73 C74 = SparkFun-Capacitors; PROD_ID: CAP-08604
C5 C34 C53 C72 = SparkFun-Capacitors; PROD_ID: CAP-07888
C8 C9 C37 C38 C56 C57 C75 C76 = SparkFun-Capacitors; PROD_ID: CAP-09137
C10 C11 C21 C22 C40 C41 C59 C60 = SparkFun-Capacitors; PROD_ID: CAP-07881
D1 D5 D7 D11 D13 D17 D19 D23 = SparkFun-LED; PROD_ID: DIO-08575
D2 D8 D14 D20 = SparkFun-LED; PROD_ID: DIO-00821
D3 D9 D15 D21 = SparkFun-LED; PROD_ID: DIO-09003
D4 D10 D16 D22 = SparkFun-LED; PROD_ID: DIO-00819
D6 D12 D18 D24 = SparkFun-IC-Power; PROD_ID: DIO-14084
E1-E4 = SparkFun-Sensors; PROD_ID: IC-14361
E$1-E$4 FD1-FD16 LOGO1-LOGO8 U$32 U$45 U$127 U$128 U$309 U$310 U$463 U$464 = SparkFun-Aesthetics
E$5 = SparkFun-Retired
J1 J10 J33 J49 = SparkFun-Connectors; PROD_ID: CONN-14122
J2 J3 J8 J11-J14 J18-J30 J34 J35 J39-J46 J50 J51 J55-J62 TP1-TP8 = SparkFun-Connectors
J4 J17 J38 J54 = SparkFun-Connectors; PROD_ID: CONN-10204; SF_ID: PRT-11543
J5 J9 J31 J32 J47 J48 J63 J64 = SparkFun-Connectors; PROD_ID: CONN-15197
J6 J15 J36 J52 = SparkFun-Connectors; PROD_ID: CONN-13694
J7 J16 J37 J53 = SparkFun-Connectors; DIGIKEY: 609-4320-2-ND; PROD_ID: CONN-14233
R1-R5 R8 R22 R24-R26 R29 R36 R38-R40 R43 R50 R52-R54 = SparkFun-Resistors; PROD_ID: RES-00818
R6 R7 R27 R28 R41 R42 R55 R56 = SparkFun-Resistors; PROD_ID: RES-12083
R9-R14 R20 R23 R30-R32 R37 R44-R46 R51 = SparkFun-Resistors; PROD_ID: RES-00824
R15-R18 R33 R34 R47 R48 = SparkFun-Resistors; PROD_ID: RES-08270
R19 R21 R35 R49 = SparkFun-Resistors; PROD_ID: RES-09823
S1-S4 = SparkFun-Switches; PROD_ID: SWCH-14139
TGT_BOOT TGT_BOOT1-TGT_BOOT3 TGT_SWD_CLK TGT_SWD_CLK1-TGT_SWD_CLK3 = SparkFun-Jumpers
U1 U10 U15 U20 = SparkFun-IC-Microcontroller; PROD_ID: IC-15168
U2 U6 U11 U16 = SparkFun-IC-Microcontroller; PROD_ID: SUB-14479
U3 U7 U12 U17 = SparkFun-Sensors; DIGIKEY: 497-14851-2-ND; PROD_ID: IC-14229
U4 U8 U13 U18 = SparkFun-IC-Power; PROD_ID: VREG-14239
U5 U9 U14 U19 = SparkFun-IC-Power; PROD_ID: VREG-12457
U$1-U$31 U$33-U$44 U$46-U$126 U$129-U$308 U$311-U$462 U$465-U$616 = buzzard_labels
X1-X4 = SparkFun-Clocks; PROD_ID: XTAL-14664
Y1-Y4 = SparkFun-Clocks; PROD_ID: XTAL-13062